# EAGLE board Top (EAGLE 9.6.1)
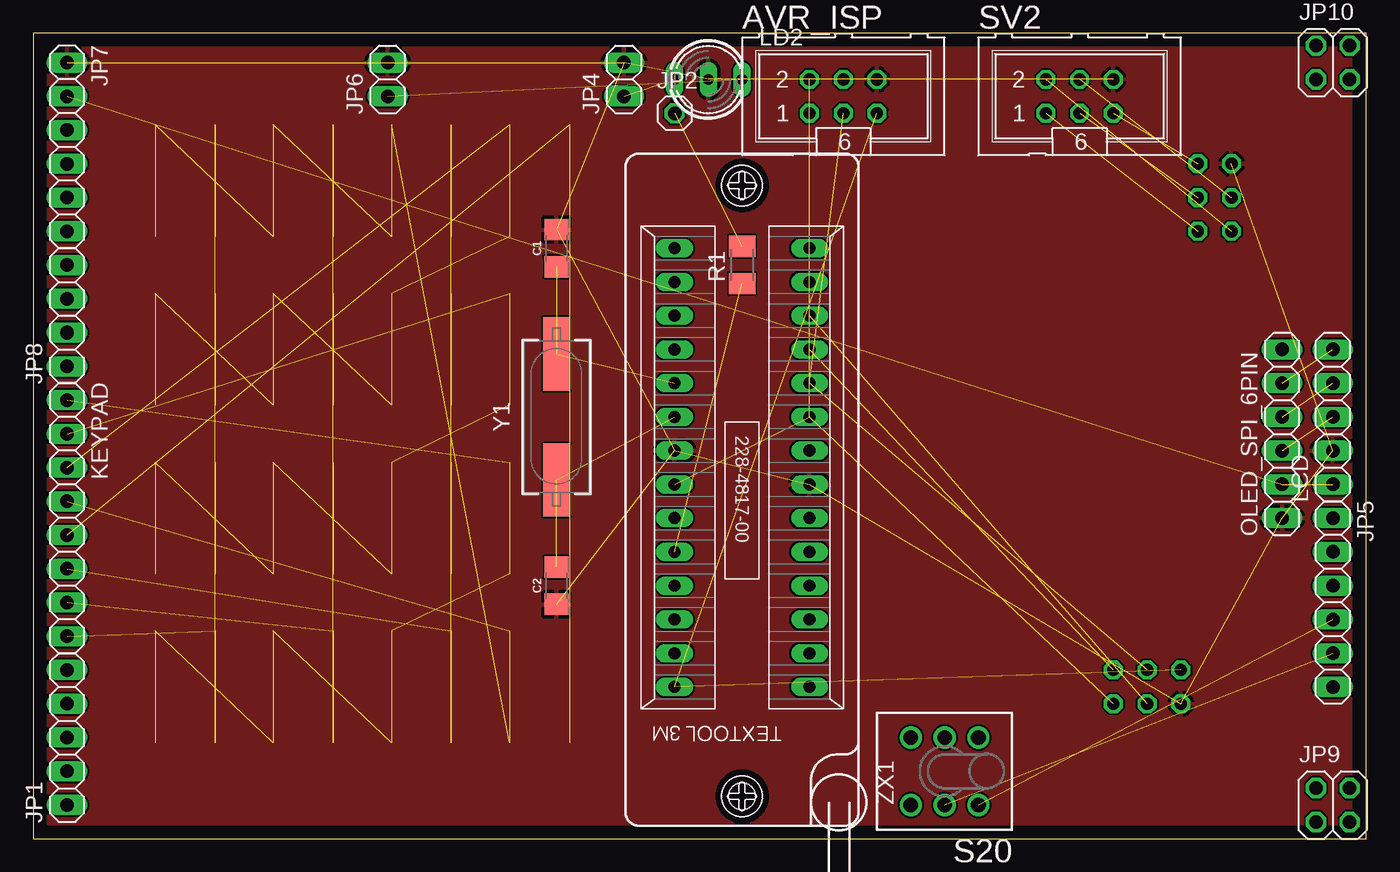
[diagram p0: board, top side]
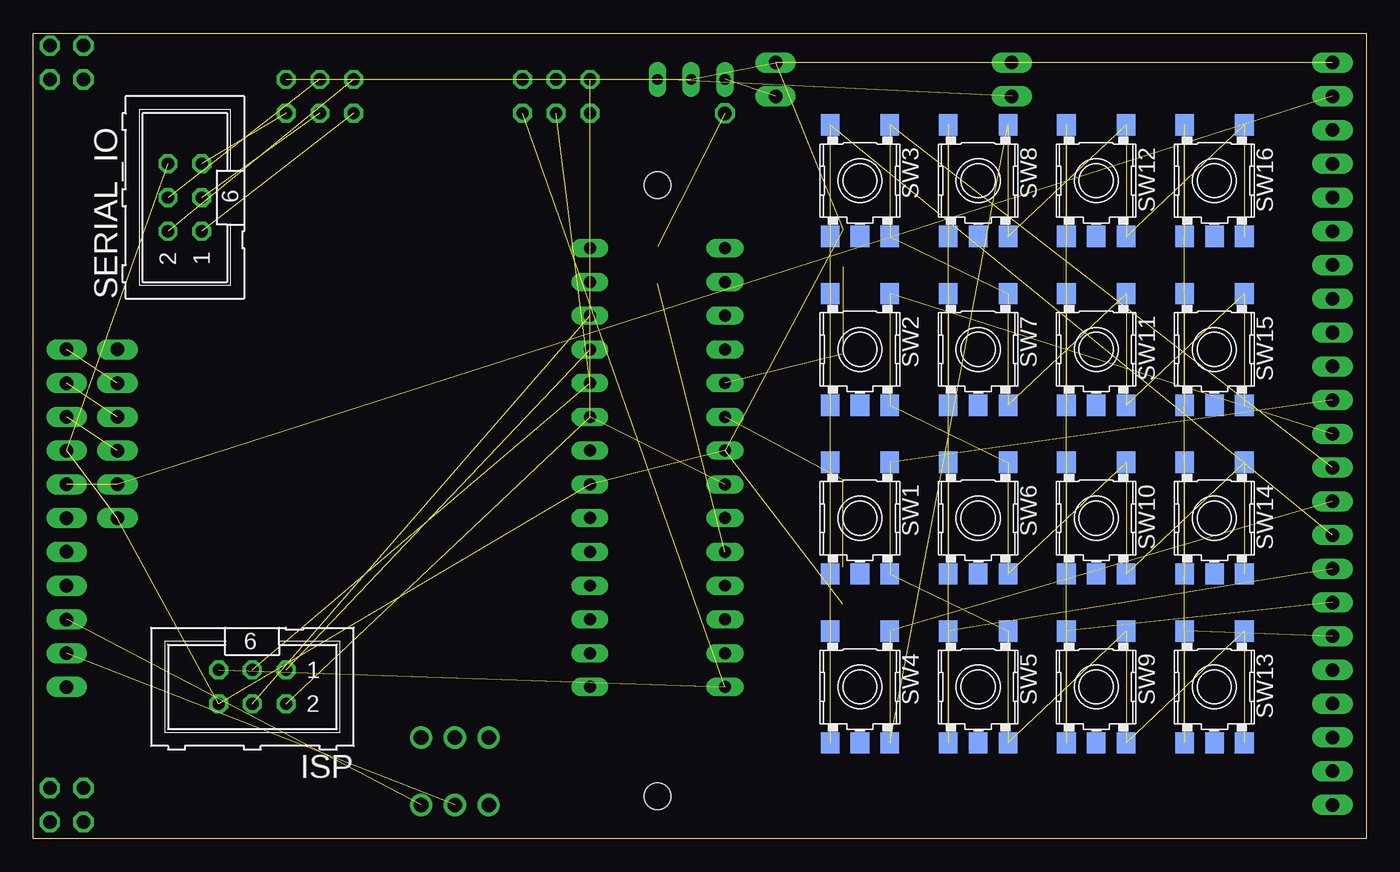
[diagram p1: board, bottom side, seen from below]

Size 100.31 x 60.63 mm. Coordinates in mm from the lower left corner, seen from the top.
Outline: 0,0 100.31,0 100.31,60.63 0,60.63 0,0
Copper layers (1*16): Top 0.035mm / dielectric 1.5mm / Bottom 0.035mm
Design rules "default": minimum track width 6mil, minimum drill 0.35mm, track to track 6mil, track to pad 6mil, pad to pad 6mil, via to via 6mil, smd to smd 6mil, copper to edge 40mil, drill to drill 6mil, minimum pad ring 10mil, minimum via ring 8mil, stop-mask expansion 4mil, vias tented up to drill 0mil, thermal gap 10mil
Net classes: 1 POWER: width 0.254 mm, clearance 0.254 mm

## Footprints (pad centres in the part's own frame; a part is rotated, then mirrored left to right if it is on the bottom)
ML6 = drill 0.914 octagon: 1 -2.54,-1.27; 2 -2.54,1.27; 3 0,-1.27; 4 0,1.27; 5 2.54,-1.27; 6 2.54,1.27
1206 = smd 1.6 x 1.8: 1 -1.4,0; 2 1.4,0
1X05 = drill 1.016 long: 1 -5.08,0; 2 -2.54,0; 3 0,0; 4 2.54,0; 5 5.08,0
1X01 = drill 1.016 octagon: 1 0,0
1X02 = drill 1.016 long: 1 -1.27,0; 2 1.27,0
1X06 = drill 1.016 long: 1 -6.35,0; 2 -3.81,0; 3 -1.27,0; 4 1.27,0; 5 3.81,0; 6 6.35,0
1X04 = drill 1.016 long: 1 -3.81,0; 2 -1.27,0; 3 1.27,0; 4 3.81,0
2X02 = drill 1.016 octagon: 1 -1.27,-1.27; 2 -1.27,1.27; 3 1.27,-1.27; 4 1.27,1.27
1X08 = drill 1.016 long: 1 -8.89,0; 2 -6.35,0; 3 -3.81,0; 4 -1.27,0; 5 1.27,0; 6 3.81,0; 7 6.35,0; 8 8.89,0
DUOLED-C-5MM = drill 0.813 long: AR 2.54,0; AX -2.54,0; C 0,0
M1206 = smd 1.6 x 2: 1 -1.4,0; 2 1.4,0
TL4XPO = drill 1.1 pad 1.676: 1 -2.54,2.54; 2 0,2.54; 3 2.54,2.54; 4 -2.54,-2.54; 5 0,-2.54; 6 2.54,-2.54
SKHMPXE010 = smd 1.6 x 1.4: 1 -4.2,2.25; 2 4.2,2.25; 3 -4.2,-2.25; 4 4.2,-2.25; 5 4.2,0
WE-XTAL_HC49/4HSMX = smd 5.5 x 2: 1 -4.75,0; 2 4.75,0
228-4817-00-0602J = drill 0.9 long: 1 -16.51,-5.08; 2 -13.97,-5.08; 3 -11.43,-5.08; 4 -8.89,-5.08; 5 -6.35,-5.08; 6 -3.81,-5.08; 7 -1.27,-5.08; 8 1.27,-5.08; 9 3.81,-5.08; 10 6.35,-5.08; 11 8.89,-5.08; 12 11.43,-5.08; 13 13.97,-5.08; 14 16.51,-5.08; 15 16.51,5.08; 16 13.97,5.08; 17 11.43,5.08; 18 8.89,5.08; 19 6.35,5.08; 20 3.81,5.08; 21 1.27,5.08; 22 -1.27,5.08; 23 -3.81,5.08; 24 -6.35,5.08; 25 -8.89,5.08; 26 -11.43,5.08; 27 -13.97,5.08; 28 -16.51,5.08 | hole 2: 21.24,0; -24.74,0

## Placement (x,y rotation side)
AVR_ISP  [ML6]  60.96,55.88 0 top
C1  2.2uF  [1206]  39.37,44.45 90 top
C2  2.2uF  [1206]  39.37,19.05 90 top
ISP  [ML6]  83.82,11.43 180 bottom
JP1  [1X05]  2.54,7.62 90 top
JP2  [1X01]  48.26,54.61 0 top
JP4  Blink  [1X02]  44.45,57.15 90 top
JP5  Switch Header  [1X06]  97.79,17.78 270 top
JP6  Pwr  [1X02]  26.67,57.15 90 top
JP7  SD Wifi  [1X06]  2.54,52.07 270 top
JP8  [1X04]  2.54,39.37 90 top
JP9  [2X02]  97.79,2.54 0 top
JP10  [2X02]  97.79,58.42 0 top
KEYPAD  [1X08]  2.54,24.13 270 top
LCD  OLED1306  [1X05]  97.79,31.75 90 top
LD2  [DUOLED-C-5MM]  50.8,57.15 0 top
OLED_SPI_6PIN  [1X06]  93.98,30.48 90 top
R1  1k  [M1206]  53.34,43.18 90 top
S20  TL46PO  [TL4XPO]  68.58,5.08 180 top
SERIAL_IO  [ML6]  88.9,48.26 90 bottom
SV2  [ML6]  78.74,55.88 0 top
SW1  SKHMPSE010  [SKHMPXE010]  38.1,24.13 270 bottom
SW2  SKHMPSE010  [SKHMPXE010]  38.1,36.83 270 bottom
SW3  SKHMPSE010  [SKHMPXE010]  38.1,49.53 270 bottom
SW4  SKHMPSE010  [SKHMPXE010]  38.1,11.43 270 bottom
SW5  SKHMPSE010  [SKHMPXE010]  29.21,11.43 270 bottom
SW6  SKHMPSE010  [SKHMPXE010]  29.21,24.13 270 bottom
SW7  SKHMPSE010  [SKHMPXE010]  29.21,36.83 270 bottom
SW8  SKHMPSE010  [SKHMPXE010]  29.21,49.53 270 bottom
SW9  SKHMPSE010  [SKHMPXE010]  20.32,11.43 270 bottom
SW10  SKHMPSE010  [SKHMPXE010]  20.32,24.13 270 bottom
SW11  SKHMPSE010  [SKHMPXE010]  20.32,36.83 270 bottom
SW12  SKHMPSE010  [SKHMPXE010]  20.32,49.53 270 bottom
SW13  SKHMPSE010  [SKHMPXE010]  11.43,11.43 270 bottom
SW14  SKHMPSE010  [SKHMPXE010]  11.43,24.13 270 bottom
SW15  SKHMPSE010  [SKHMPXE010]  11.43,36.83 270 bottom
SW16  SKHMPSE010  [SKHMPXE010]  11.43,49.53 270 bottom
Y1  20MHz  [WE-XTAL_HC49/4HSMX]  39.37,31.75 90 top
ZX1  228-4817-00-0602J  [228-4817-00-0602J]  53.34,27.94 90 top

## Library data of the parts
AVR_ISP ISP SERIAL_IO SV2 = con-harting-ml
C1 C2 = SparkFun-Capacitors; PROD_ID: CAP-10009
JP1 JP2 JP4-JP10 KEYPAD LCD OLED_SPI_6PIN = pinhead
LD2 = led
R1 = rcl; SPICEPREFIX: R
S20 SW1-SW16 = switch
Y1 = Wurth_Quartz Crystals & Oscillators_WE-XTAL; C-LOAD: 18pF; DATASHEET-URL: https://www.we-online.com/catalog/datasheet/830061856.pdf; MOUNT: SMT; PART-NUMBER: 830061856; STABILITY: 10ppm; TOLERANCE: ±10ppm
ZX1 = con-3m; MF: 3M; MPN: 228-4817-00-0602J; OC_FARNELL: 1252775; OC_NEWARK: 85K7834

## Nets
2BLK: R1.1 ZX1.24
+3V3: JP7.2 LCD.1 OLED_SPI_6PIN.2
BAT_CON: JP5.4 S20.1
CLK: JP7.4
CS: JP7.6
D11: SERIAL_IO.1 SV2.1
D12: LCD.5 OLED_SPI_6PIN.5
DC: OLED_SPI_6PIN.6
DI: JP7.5
DO: JP7.3
GND: AVR_ISP.6 C1.2 C2.1 ISP.6 JP4.2 JP6.2 JP7.1 LCD.2 LD2.C OLED_SPI_6PIN.1 SERIAL_IO.6 SV2.6 ZX1.7 ZX1.21
MISO: AVR_ISP.1 ISP.1 ZX1.11
MOSI: AVR_ISP.4
MOSI1: ISP.4 ZX1.12
N$1: C1.1 Y1.2 ZX1.19
N$2: C2.2 Y1.1 ZX1.20
N$3: JP6.1 LD2.AR
N$4: JP2.1 R1.2
N$14: JP4.1 LD2.AX
P0: KEYPAD.8 SW13.3 SW13.4 SW14.3 SW14.4 SW15.3 SW15.4 SW16.3 SW16.4
P1: KEYPAD.7 SW9.3 SW9.4 SW10.3 SW10.4 SW11.3 SW11.4 SW12.3 SW12.4
P2: KEYPAD.6 SW5.3 SW5.4 SW6.3 SW6.4 SW7.3 SW7.4 SW8.3 SW8.4
P3 [POWER]: KEYPAD.5 SW1.3 SW1.4 SW2.3 SW2.4 SW3.3 SW3.4 SW4.3 SW4.4
P4: KEYPAD.4 SW4.1 SW4.2 SW8.1 SW8.2 SW12.1 SW12.2 SW16.1 SW16.2
P5: KEYPAD.3 SW3.1 SW3.2 SW7.1 SW7.2 SW11.1 SW11.2 SW15.1 SW15.2
P6: KEYPAD.2 SW2.1 SW2.2 SW6.1 SW6.2 SW10.1 SW10.2 SW14.1 SW14.2
P7: KEYPAD.1 SW1.1 SW1.2 SW5.1 SW5.2 SW9.1 SW9.2 SW13.1 SW13.2
R2IN: SERIAL_IO.5 SV2.5
RST: AVR_ISP.5 ISP.5 ZX1.28
RX: SERIAL_IO.2 SV2.2
SCK: AVR_ISP.3 ISP.3 ZX1.10
SCL: LCD.3 OLED_SPI_6PIN.3
SDA: LCD.4 OLED_SPI_6PIN.4
T2OUT: SERIAL_IO.3 SV2.3
TX: SERIAL_IO.4 SV2.4
V.BAT: JP5.5 S20.2
VCC: AVR_ISP.2 ISP.2 ZX1.9 ZX1.22

## Tracks (layer width: path | path; a pad name or v marks a point on that pad's centre or on a via)
2BLK  (1 unrouted)
+3V3  (2 unrouted)
BAT_CON  (1 unrouted)
D11  (1 unrouted)
D12  (1 unrouted)
GND  (13 unrouted)
  pour Top: 0,0 100.33,0 100.33,60.96 0,60.96
MISO  (2 unrouted)
MOSI1  (1 unrouted)
N$1  (2 unrouted)
N$2  (2 unrouted)
N$3  (1 unrouted)
N$4  (1 unrouted)
N$14  (1 unrouted)
P0  (8 unrouted)
P1  (8 unrouted)
P2  (8 unrouted)
P3  (8 unrouted)
P4  (8 unrouted)
P5  (8 unrouted)
P6  (8 unrouted)
P7  (8 unrouted)
R2IN  (1 unrouted)
RST  (2 unrouted)
RX  (1 unrouted)
SCK  (2 unrouted)
SCL  (1 unrouted)
SDA  (1 unrouted)
T2OUT  (1 unrouted)
TX  (1 unrouted)
V.BAT  (1 unrouted)
VCC  (3 unrouted)